# Altium PCB pren-et_DC.PcbDoc
Units mm, origin at the board's own origin, x right, y up, seen from the top; angles counter-clockwise.
Board outline 152.4 x 101.6 mm, 2 copper layers (Top Layer, Bottom Layer); 55 components, 45 nets, 174 pads, 57 vias.
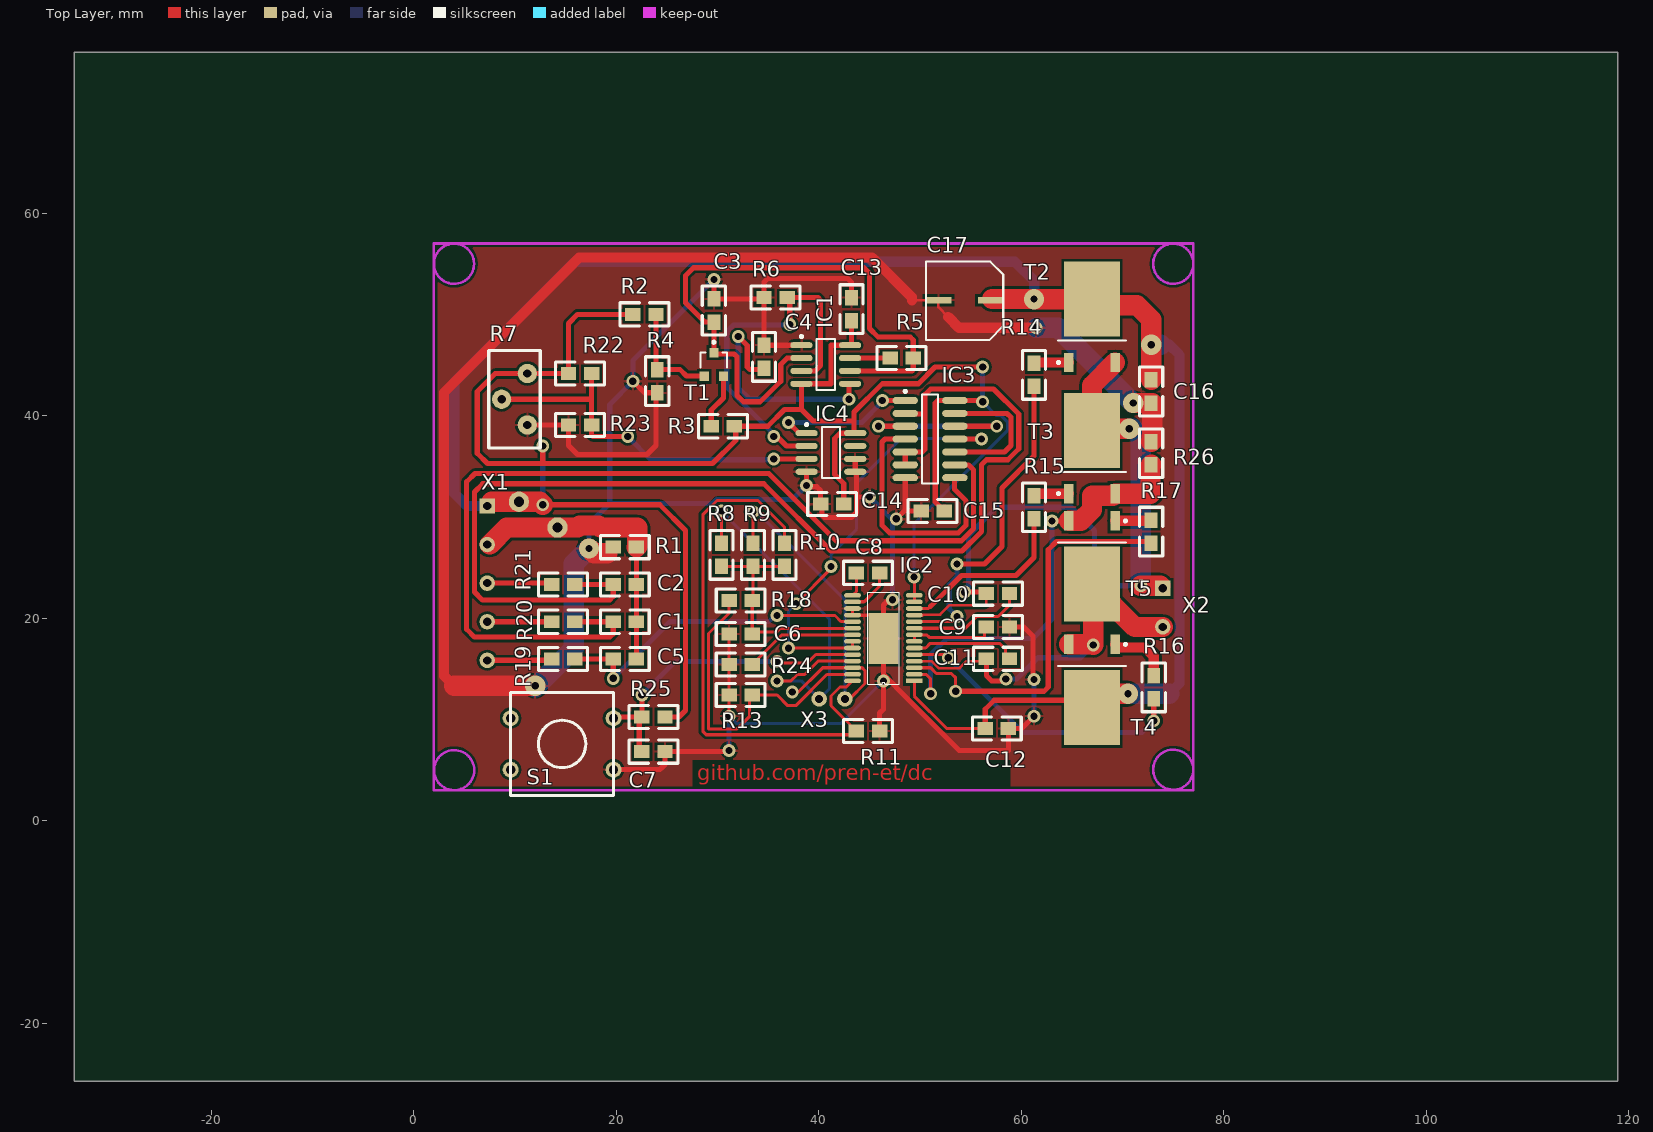
[diagram p0: Top Layer view]
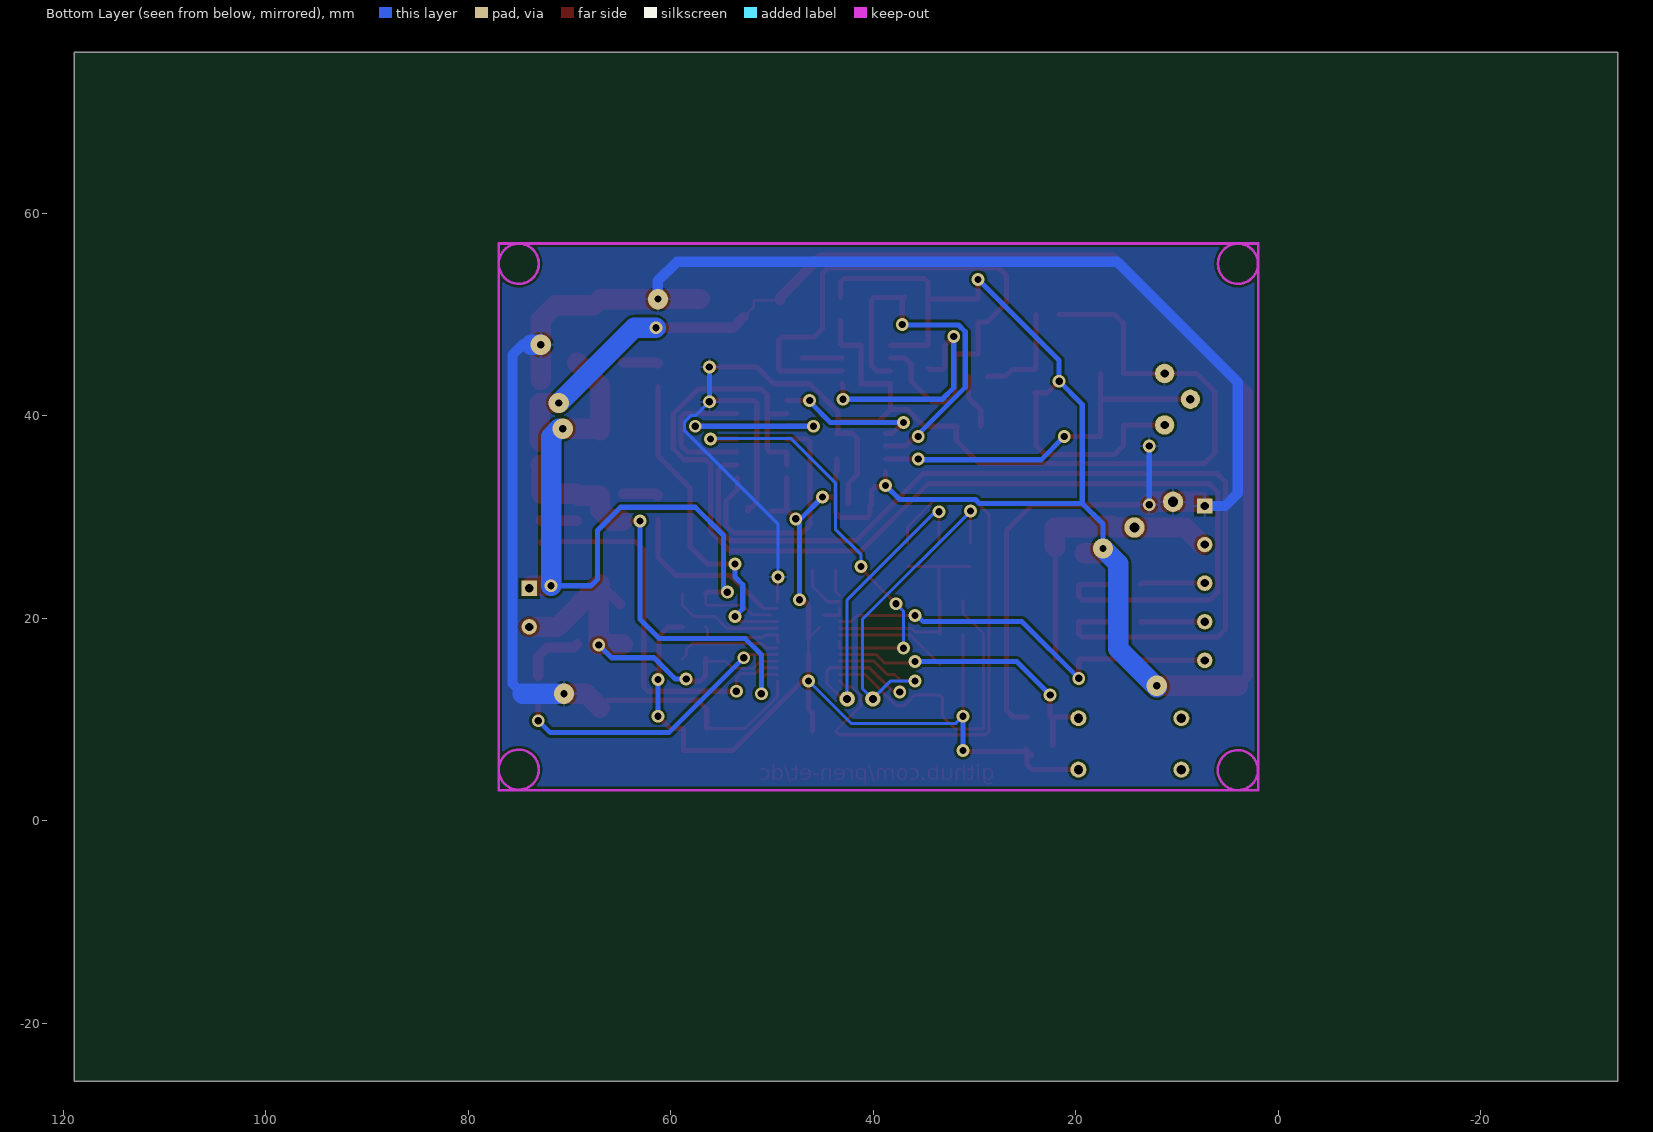
[diagram p1: Bottom Layer view, seen from below]

## Layer stack, top to bottom
Top Solder: solder mask 0.0102, Solder Resist, Dk 3.5
Top Layer: signal copper 0.0356
Dielectric 1: dielectric 0.32, FR-4, Dk 4.8
Bottom Layer: signal copper 0.0356
Bottom Solder: solder mask 0.0102, Solder Resist, Dk 3.5

## Board outline
-33.508,-25.72 118.892,-25.72 118.892,75.88 -33.508,75.88

## Design rules (kind name [scope] priority, off if disabled: settings)
Clearance A3941 [(InComponent('IC2')) and ispad vs (InComponent('IC2')) and ispad] p1: gap=0.127
Clearance Clearance_1 [All] p2: gap=0.254
HoleSize [All] p1: absolutevalues=TRUE maxlimit=3.4 minlimit=0.025 maxpercent=80.000 minpercent=20.000
MinimumSolderMaskSliver [All] p1: minsoldermaskwidth=0.127
PolygonConnect [All] p1: connectstyle=Relief reliefconductorwidth=0.254 reliefentries=4 polygonreliefangle="90 Angle" airgapwidth=0.254
RoutingVias [All] p1: holewidth=0.711 width=1.27 viastyle="Through Hole" minholewidth=0.711 minwidth=1.27 maxholewidth=0.711 maxwidth=1.27
SilkToSilkClearance [All] p1: silktosilkclearance=0.127
SolderMaskExpansion [All] p1: expansion=0.102
UnpouredPolygon [All] p1: allowunpoured=FALSE
Width [All] p1: maxlimit=2 minlimit=0.127 preferedwidth=0.508
26 further rules are at their usual default settings.

## Components (designator, comment, footprint, x,y, rotation, side; value= is the part's Value field where it differs from the comment)
C1 "10p" 0805 19.712,19.652 r0 top
C2 "10p" 0805 19.712,23.335 r0 top
C3 "100n" 0805 29.644,49.243 r90 top
C4 "100n" 0805 34.597,44.671 r90 top
C5 "10p" 0805 19.712,15.969 r0 top
C6 "100n" 0805 33.435,18.431 r180 top
C7 "200n" 0805 24.818,6.825 r180 top
C8 "470n" 0805 43.722,24.478 r0 top
C9 "200n" 0805 56.549,19.124 r0 top
C10 "33n" 0805 58.835,22.426 r180 top
C11 "33n" 0805 56.549,15.991 r0 top
C12 "100n" 0805 58.727,9.111 r180 top
C13 "100n" 0805 43.233,51.656 r270 top
C14 "100n" 0805 42.471,31.285 r180 top
C15 "100n" 0805 50.104,30.574 r0 top
C16 "100n" 0805 72.824,41.242 r90 top
C17 "470u" "EEEFP1E471AP Elko" 54.409,51.402 r0 top
IC1 "TLC555CDR" D008_N 40.693,45.052 r0 top
IC2 "A3941" A3941 49.437,13.81 r180 top
IC3 "CD4001BCM" M14A_M 50.993,37.686 r0 top
IC4 "LM393D" D008_N 41.201,36.365 r0 top
R1 "0" 0805 21.998,27.018 r180 top
R2 "10k" 0805 23.929,50.005 r180 top
R3 "10k" 0805 29.39,38.956 r0 top
R4 "10k" 0805 24.056,42.258 r90 top
R5 "100" 0805 49.329,45.687 r180 top
R6 "10k" 0805 34.597,51.656 r0 top
R7 "10k" POT2 8.689,41.623 r270 top
R8 "10k" 0805 30.387,27.399 r270 top
R9 "10k" 0805 33.499,27.399 r270 top
R10 "20k" 0805 36.61,27.399 r270 top
R11 "30k" 0805 46.008,8.857 r180 top
R13 "400k" 0805 31.149,12.419 r0 top
R14 "50" 0805 61.267,45.179 r270 top
R15 "50" 0805 61.267,32.098 r270 top
R16 "50" 0805 73.078,12.032 r90 top
R17 "50" 0805 72.824,27.399 r90 top
R18 "0" 0805 33.435,21.756 r180 top
R19 "0" 0805 15.902,15.969 r180 top
R20 "0" 0805 15.902,19.652 r180 top
R21 "0" 0805 15.902,23.335 r180 top
R22 "0" 0805 17.579,44.163 r180 top
R23 "0" 0805 15.293,39.083 r0 top
R24 "0" 0805 33.435,15.425 r180 top
R25 "10k" 0805 22.532,10.254 r0 top
R26 "0" 0805 72.824,37.432 r270 top
S1 "SW-PB" SW_JB15FBP2 14.658,7.587 r90 top
T1 "BSR16" BSR16 29.644,45.052 r0 top
T2 "IRFR3806PBF" TO-252AA_N 66.982,49.758 r90 top
T3 "IRFR3806PBF" TO-252AA_N 66.982,36.797 r90 top
T4 "IRFR3806PBF" TO-252AA_N 66.982,12.921 r270 top
T5 "IRFR3806PBF" TO-252AA_N 66.982,25.113 r270 top
X1 "Header 5" "connector 5 Pin" 7.266,31.082 r270 top
X2 "MHDR1X2" "Connector 2 Pin" 73.967,22.954 r270 top
X3 "CON2" "Testpoint 2 Pin" 40.039,12.032 r0 top

## Footprints (in the part's own frame and the unit in brackets; to place one, negate y for a bottom-side part, rotate by r counter-clockwise, add the part's x,y. Pads: shape width x height; smd on the part's side, far side on the other; paste and mask are expansions set on the pad)
0805 [mil]
  rect 60x50 smd: 1(0,0) 2(90,0)
  silkscreen extent -50,-45 140,45
A3941 [mm] "A3941 SOIC IC"
  rect 1.65x0.45 smd: 1(0,0)
  oval 1.65x0.45 smd: 2(0,-0.65) 3(0,-1.3) 4(0,-1.95) 5(0,-2.6) 6(0,-3.25) 7(0,-3.9) 8(0,-4.55) 9(0,-5.2) 10(0,-5.85) 11(0,-6.5) 12(0,-7.15) 13(0,-7.8) 14(0,-8.45) 15(6.1,-8.45) 16(6.1,-7.8) 17(6.1,-7.15) 18(6.1,-6.5) 19(6.1,-5.85) 20(6.1,-5.2) 21(6.1,-4.55) 22(6.1,-3.9) 23(6.1,-3.25) 24(6.1,-2.6) 25(6.1,-1.95) 26(6.1,-1.3) 27(6.1,-0.65) 28(6.1,0)
  rect 3x5 smd: 29(3.048,-4.191)
  silkscreen extent 1.51,-8.78 4.59,0.33
BSR16 [mm] "BSR16 SOT23"
  rect 0.9x0.95 smd: B(-0.95,-1.175) C(0,1.175) E(0.95,-1.175)
  silkscreen extent -1.3,-0.3 1.3,2.32
"Connector 2 Pin" [mil] "Connector 2 Pin"
  rect 60x60 hole 31.5: 1(0,0)
  round 60 hole 31.5: 2(150,0)
"connector 5 Pin" [mil] "connector 5 Pin"
  rect 60x60 hole 31.5: 1(0,0)
  round 60 hole 31.5: 2(150,0) 3(300,0) 4(450,0) 5(600,0)
D008_N [mm] "SOIC, 8-Leads, Body 4.9x3.9mm, Pitch 1.27mm, IPC Medium Density"
  oval 2.2x0.6 smd: 1(-2.4,1.905) 2(-2.4,0.635) 3(-2.4,-0.635) 4(-2.4,-1.905) 5(2.4,-1.905) 6(2.4,-0.635) 7(2.4,0.635) 8(2.4,1.905)
  silkscreen extent -2.52,-2.5 0.9,2.88, body extent -1.95,-2.45 1.95,2.45, height 1.75
"EEEFP1E471AP Elko" [mm] "Elko 470uF"
  rect 2.6x0.65 smd: A(2.6,0) K(-2.6,0)
  silkscreen extent -3.81,-3.94 3.81,3.81
M14A_M [mm] "SOIC, 14-Leads, Body 8.6x3.9mm, Pitch 1.27mm, IPC Low Density"
  oval 2.5x0.7 smd: 1(-2.45,3.81) 2(-2.45,2.54) 3(-2.45,1.27) 4(-2.45,0) 5(-2.45,-1.27) 6(-2.45,-2.54) 7(-2.45,-3.81) 8(2.45,-3.81) 9(2.45,-2.54) 10(2.45,-1.27) 11(2.45,0) 12(2.45,1.27) 13(2.45,2.54) 14(2.45,3.81)
  silkscreen extent -2.57,-4.4 0.8,4.83, body extent -2,-4.38 2,4.38, height 1.75
POT2 [mil]
  round 75 hole 32: 1(-100,100) 2(0,0) 3(100,100)
  silkscreen extent -190,-50 190,150
SW_JB15FBP2 [mil]
  round 62 hole 36: 1(-100,-200) 2(100,-200) 3(100,200) 4(-100,200)
  silkscreen extent -200,-200 200,200
"Testpoint 2 Pin" [mil] "Testpoint 2 Pin"
  round 60 hole 31.5: 1(0,0) 2(100,0)
TO-252AA_N [mm] "D-PAK, 4-Leads, Body 6.1x6.5mm, Pitch 2.28mm, Lead Span 9.9mm, IPC Medium Density"
  rect 1.9x0.95 smd: 1(-4.5,2.28) 3(-4.5,-2.28)
  rect 7.4x5.5 smd: 4(1.75,0)
  silkscreen extent -4.62,-3.35 -2.35,3.43, body extent -2.25,-3.37 4.1,3.37, height 2.38

## Part data
C1 C2 C3 C4 C5 C6 C7 C8 C9 C10 C11 C12 C13 C14 C15 C16: library part C?, "Normaler Kondensator"
C17: library part "C? ELKO", "Elektrolyt /polarisierter Kondensator"
IC1: "LinCMOS Timer"
IC2: "A3941 SOIC IC"
IC3: "Quad 2-Input NOR Buffered B series Gate, 14-Pin SOIC"
IC4: "Dual Differential Comparator"
R1 R2 R3 R4 R5 R6 R8 R9 R10 R11 R13 R14 R15 R16 R17 R18 R19 R20 R21 R22 R23 R24 R25 R26: library part R?, "Normaler Widerstand"
R7: library part R_POT1
S1: "Switch"
T1: library part PNP
T2 T3 T4 T5: library part IRFR014, "N-Channel Power MOSFET"
X1: "Header, 5-Pin"
X2: "Header, 2-Pin"

## Free pads (board coordinates)
  round 2 hole 1: GND(14.208,28.956) VCC(10.398,31.496)

## Via types
v1: diameter 1.27, hole 0.711, Top Layer to Bottom Layer, 50 vias
v2: diameter 2, hole 0.711, Top Layer to Bottom Layer, 7 vias

## Nets (pads, with @x,y where several pads share a name; then routed paths per layer and width w, separated by ;. In a path a pad name is that pad's centre, name@x,y a point inside that pad or via, vN(x,y) a via of type N, cw(c..) or ccw(c..) an arc to the next point about the centre after c; other vN are vias at no path point)
GND: C1.2 C2.2 C5.2 pad.GND R1.1 X1.2 | length 28.5
  Top Layer w0.508: C5.2 C1.2 C2.2 R1.1
  Top Layer w2: X1.2@7.504,27.272 9.188,28.956 11.818,28.956 11.82,28.955 13.687,28.955 13.688,28.956 16.203,28.956 16.392,29.145 18.259,29.145 18.448,28.956 22.082,28.956 22.082,27.102 R1.1
GND_FILT: C3.2 C4.2 C6.2 C7.1 C9.2 C12.1 C13.1 C14.2 C15.1 C16.1 C17.K IC1.1 IC2.17 IC2.18 IC2.29 IC3.7 IC4.4 IC4.5 IC4.6 R1.2 R4.1 R6.1 R7.3 R11.1 R13.1 R23.1 R24.2 R26.1 S1.1 | length 369.9
  Top Layer w0.254: 49.202,51.402 C17.K 51.809,50.713 52.771,49.751
  Top Layer w0.305: 24.31,5.047 24.437,5.174 ; v1(31.149,10.326) R13.1 R24.2 C6.2 ; IC2.17@43.319,20.979 IC2.17 IC2.18 43.356,20.291 44.88,20.291 44.884,20.287 ; IC2.29@45.312,19.079 IC2.29 IC2.29@46.389,16.35
  Top Layer w0.508: R7.3 R23.1 15.293,37.051 16.182,36.162 23.04,36.162 23.929,37.051 23.929,42.131 R4.1 22.786,42.258 v1(21.643,43.401) ; R1.2@19.11,26.416 R1.2 ; S1.1 24.31,5.047 ; C7.1@24.31,6.444 C7.1@24.945,7.079 ; 24.437,5.174 24.818,5.555 C7.1 31.041,6.825 31.041,6.844 v1(31.149,6.952) ; v1(29.644,53.459) C3.2 34.47,51.529 R6.1 ; IC1.1 C4.2 R6.1 ; IC4.4 38.801,33.127 v1(38.788,33.114) 38.915,32.987 39.804,32.987 40.185,32.606 C14.2 40.312,31.158 40.312,30.218 40.591,29.939 43.233,29.939 43.436,30.142 43.444,30.142 43.741,30.439 43.741,31.971 ; C13.1 43.233,53.18 42.852,53.561 34.978,53.561 34.597,53.18 R6.1 ; IC4.6 IC4.5 43.741,34.32 43.741,31.971 ; v1(45.011,31.971) 43.741,31.971 ; R11.1 46.008,10.637 46.387,11.016 46.387,13.808 v1(46.389,13.81) ; IC2.29@46.389,16.35 46.389,14.464 47.678,13.175 47.678,13.13 53.856,6.952 58.727,6.952 C12.1 60.053,9.111 v1(61.267,10.326) ; IC2.29 46.389,21.292 47.278,22.181 v1(47.278,21.819) ; v1(47.658,29.812) 48.543,30.697 48.543,30.865 ; IC3.7 48.543,30.865 ; C15.1 48.834,30.574 48.543,30.865 ; C9.2 60.231,19.124 60.251,19.144 61.14,18.255 61.14,14.064 v1(61.267,13.937)
  Top Layer w1.016: 3.99,13.327 3,14.318 3,42.284 16.335,55.618 45.265,55.618 49.202,51.681 49.202,51.402 ; 52.771,49.751 53.843,48.679 v1(61.466,48.679)
  Top Layer w2: 3.99,13.327 v2(12,13.327) ; v2(17.325,26.891) 17.8,26.416 R1.2@19.11,26.416 ; v2(71.046,41.242) C16.1 72.921,41.242 72.921,37.528 R26.1
  Bottom Layer w0.305: v1(31.149,10.326) 31.856,9.619 42.198,9.619 v1(46.389,13.81)
  Bottom Layer w0.508: v2(17.325,26.891) 17.325,29.304 19.357,31.336 ; v1(29.644,53.459) 21.643,45.458 v1(21.643,43.401) 19.357,41.115 19.357,31.336 ; v1(31.149,6.952) v1(31.149,10.326) ; v1(38.788,33.114) 37.391,31.717 29.914,31.717 29.532,31.336 19.357,31.336 ; v1(45.011,31.971) 47.17,29.812 v1(47.658,29.812) 47.278,29.432 v1(47.278,21.819) ; v1@61.14,13.99 61.193,13.937 v1(61.267,13.937) v1(61.267,10.326)
  Bottom Layer w2: v2(12,13.327) 12,13.175 15.801,16.976 15.801,25.367 v2(17.325,26.891) ; v1(61.466,48.679) 63.609,48.679 v2(71.046,41.242)
NetC1_1: C1.1 IC3.9 R20.1 | length 96
  Top Layer w0.508: R20.1 C1.1 19.712,18.468 19.372,18.128 6.022,18.128 5.234,18.916 5.234,33.469 6.055,34.29 35.065,34.29 39.213,30.142 39.221,30.142 41.709,27.653 54.09,27.653 55.298,28.861 55.298,34.638 54.79,35.146 IC3.9
NetC2_1: C2.1 IC3.2 IC3.5 IC3.6 R21.1 | length 118.5
  Top Layer w0.508: R21.1 C2.1 19.712,22.166 19.357,21.811 6.784,21.811 5.996,22.599 5.996,32.454 6.817,33.274 34.564,33.274 41.201,26.637 54.152,26.637 56.06,28.546 56.06,35.146 56.568,35.654 58.662,35.654 59.743,36.735 59.743,40.161 57.265,42.639 51.053,42.639 50.472,42.058 50.472,40.161 ; IC3.6 IC3.5 50.218,36.416 50.472,36.67 50.472,40.161 ; IC3.2 48.608,40.161 50.472,40.161
NetC3_1: C3.1 IC1.2 IC1.6 R5.1 T1.C | length 63.2
  Top Layer w0.508: IC1.2 36.883,45.687 36.248,45.052 36.248,43.401 34.216,41.369 32.565,41.369 31.93,42.004 31.93,45.814 31.644,46.1 29.644,46.1 C3.1 28.755,49.243 26.85,51.148 26.85,53.815 27.638,54.602 44.478,54.602 45.011,54.069 45.011,48.615 45.875,47.751 49.043,47.751 49.329,47.465 R5.1 49.329,44.544 49.202,44.417 IC1.6
NetC4_1: C4.1 IC1.5 | length 23.2
  Top Layer w0.508: v1(32.057,47.807) 32.946,46.918 32.946,44.798 33.2,44.544 34.47,44.544 C4.1 ; v1(42.979,41.623) 42.979,43.033 IC1.5
  Bottom Layer w0.508: v1(32.057,47.807) 32.057,42.766 33.175,41.648 33.175,41.623 v1(42.979,41.623)
NetC5_1: C5.1 IC2.19 R19.1 | length 32.2
  Top Layer w0.305: v1(35.867,20.266) 41.598,20.266 42.185,19.679 43.319,19.679 IC2.19
  Top Layer w0.508: R19.1 C5.1 v1(19.712,14.064)
  Bottom Layer w0.508: v1(19.712,14.064) 25.308,19.66 35.056,19.66 35.662,20.266 v1(35.867,20.266)
NetC6_1: C6.1 IC2.20 R8.2 R9.2 R10.2 R18.1 | length 23.1
  Top Layer w0.305: R8.2 R9.2 ; R10.2 R9.2 ; IC2.20 43.319,18.991 36.211,18.991 35.856,18.636 33.641,18.636 C6.1 R18.1 33.499,21.819 R9.2
NetC7_2: C7.2 IC2.24 R25.1 S1.2 | length 30.4
  Top Layer w0.305: v1(35.893,15.715) 36.02,15.588 38.896,15.588 39.718,16.41 IC2.24
  Top Layer w0.508: S1.2 19.865,10.254 R25.1@22.278,10.254 ; 22.278,7.46 R25.1@22.278,10.254 ; v1(22.532,12.413) R25.1 R25.1@22.278,10.254
  Bottom Layer w0.508: v1(22.532,12.413) 25.834,15.715 v1(35.893,15.715)
NetC8_1: C8.1 IC2.15 | length 2.6
  Top Layer w0.305: IC2.15 43.722,22.645 C8.1@43.722,24.732
NetC8_2: C8.2 IC2.16 | length 4.9
  Top Layer w0.305: IC2.16@43.356,21.629 44.49,21.629 46.008,23.147 C8.2@46.008,24.732
NetC9_1: C9.1 IC2.7 IC2.8 | length 8.9
  Top Layer w0.305: IC2.7@49.297,17.71 IC2.7 IC2.8 50.645,18.36 50.899,18.106 56.369,18.106 56.369,18.944 C9.1
NetC10_1: C10.1 IC2.9 | length 11.5
  Top Layer w0.305: IC2.9 54.463,19.01 55.619,20.166 57.717,20.166 58.835,21.284 C10.1
NetC10_2: C10.2 IC2.11 T2.3 T3.4 X2.1 | length 70
  Top Layer w0.254: IC2.11@50.174,20.31 IC2.11@50.218,20.266 ; IC2.11@50.174,20.354 51.986,20.354 52.915,21.283 56.441,21.283 56.549,21.391 C10.2
  Top Layer w0.508: v1(54.409,22.573) 56.402,22.573 C10.2
  Top Layer w1.016: X2.1@73.713,23.208 X2.1
  Top Layer w2: T2.3 66.982,42.978 T3.4 67.137,38.702 v2(70.667,38.702) ; v1(71.808,23.208) X2.1@73.713,23.208
  Bottom Layer w0.508: v1(54.409,22.573) 54.536,22.573 54.79,22.827 54.79,28.161 57.584,30.955 64.95,30.955 67.236,28.669 67.236,23.843 67.871,23.208 v1(71.808,23.208)
  Bottom Layer w1.016: v2(70.667,38.702) v2@71.046,38.702
  Bottom Layer w2: v2@71.046,38.702 71.808,37.94 v1(71.808,23.208)
NetC11_1: C11.1 IC2.4 T4.3 T5.4 X2.2 | length 43.6
  Top Layer w0.254: IC2.4 51.157,15.76 51.837,15.08 53.918,15.08 54.598,15.76 56.318,15.76 C11.1
  Top Layer w0.508: C11.1 56.549,14.337 57.076,13.81 v1@58.2,13.81 ; T4.3 64.757,17.366 v1(67.109,17.366)
  Top Layer w1.016: T5.4@65,21.381 T5.4 ; 71.681,19.124 71.701,19.144
  Top Layer w2: T4.3 67.054,17.421 v1(67.109,17.366) T5.4@67.109,23.236 ; T5.4 T5.4@67.109,23.236 ; 71.681,19.124 71.221,19.124 T5.4@67.109,23.236 ; 71.701,19.144 X2.2
  Bottom Layer w0.508: v1(58.473,13.99) 59.542,13.99 61.648,16.096 65.839,16.096 v1(67.109,17.366)
NetC11_2: C11.2 IC2.6 | length 10.6
  Top Layer w0.305: IC2.6@49.456,17.041 IC2.6 50.56,17.06 51.015,17.515 57.85,17.515 58.454,16.911 58.454,16.372 C11.2
NetIC1_3: IC1.3 IC4.2 R6.2 | length 37.2
  Top Layer w0.508: v1(35.562,37.94) 35.867,37.94 36.808,37 IC4.2 ; v1(37.137,48.989) 37.137,51.402 R6.2 39.931,51.656 40.185,51.402 40.185,44.936 39.666,44.417 IC1.3
  Bottom Layer w0.508: v1(35.562,37.94) 35.562,38.158 30.914,42.806 30.914,48.28 31.584,48.95 37.098,48.95 v1(37.137,48.989)
NetIC1_7: IC1.7 R5.2 | length 3.9
  Top Layer w0.508: IC1.7 R5.2
NetIC2_2: IC2.2 R26.2 T3.3 T5.3 | length 44.8
  Top Layer w0.305: IC2.2 50.583,14.46 51.053,13.99 v1(51.053,12.54)
  Top Layer w0.508: v1(63.045,29.613) T5.3
  Top Layer w2: T5.3 65.894,29.613 66.982,30.701 66.982,32.098 69.063,32.098 T3.3 72.752,32.297 72.752,35.074 R26.2
  Bottom Layer w0.508: v1(51.053,12.54) 51.053,16.403 52.631,17.981 61.12,17.981 63.045,19.906 v1(63.045,29.613)
NetIC2_3: IC2.3 R17.1 | length 39.4
  Top Layer w0.305: IC2.3 51.053,15.11 51.616,14.547 53.094,14.547 53.52,14.12 v1(53.52,12.794)
  Top Layer w0.508: v1(53.52,12.794) 62.258,12.794 62.664,13.2 62.664,26.764 63.471,27.571 72.824,27.571 R17.1
NetIC2_5: IC2.5 R16.1 | length 29.5
  Top Layer w0.305: IC2.5 52.473,16.41 v1(52.787,16.096)
  Top Layer w0.508: v1(73.078,9.873) R16.1
  Bottom Layer w0.508: v1(52.787,16.096) 60.153,8.73 71.935,8.73 v1(73.078,9.873)
NetIC2_10: IC2.10 R14.2 | length 32.6
  Top Layer w0.305: IC2.10@49.419,19.641 IC2.10 53.142,19.66 v1(53.647,20.166)
  Top Layer w0.508: v1(53.647,25.367) 56.369,25.367 58.092,27.09 58.092,32.86 61.267,36.035 R14.2
  Bottom Layer w0.508: v1(53.647,20.166) 52.885,20.928 52.885,23.305 53.647,24.067 v1(53.647,25.367)
NetIC2_12: IC2.12 R15.2 | length 17.7
  Top Layer w0.305: IC2.12 50.837,20.96 51.053,21.176
  Top Layer w0.508: 51.053,21.176 54.101,24.224 56.304,24.224 59.489,24.224 61.267,26.002 R15.2
NetIC2_21: IC2.21 R24.1 | length 11.1
  Top Layer w0.305: R24.1 36.37,18.36 IC2.21 IC2.21@43.319,18.341
NetIC2_22: IC2.22 IC2.23 IC3.11 | length 42.5
  Top Layer w0.305: v1@37.429,17.041 37.855,17.041 43.319,17.041 IC2.23 IC2.22 ; v1(37.753,21.43) 41.201,24.878 v1(41.201,25.113)
  Top Layer w0.508: IC3.11 v1(56.06,37.686)
  Bottom Layer w0.305: v1(37.01,17.041) 37.01,20.687 v1(37.753,21.43) ; v1(41.201,25.113) 41.201,26.256 43.741,28.796 43.741,33.368 48.135,37.762 55.985,37.762 v1(56.06,37.686)
NetIC2_25: IC2.25 R8.1 X3.1 | length 39.7
  Top Layer w0.305: R8.1 v1(30.387,30.574) ; v1(35.893,13.81) 37.268,13.81 37.899,14.441 38.61,14.441 39.929,15.76 IC2.25
  Bottom Layer w0.305: v1(30.387,30.574) 41.055,19.906 41.055,13.048 X3.1 38.261,13.81 v1(35.893,13.81)
NetIC2_26: IC2.26 R9.1 X3.2 | length 38.2
  Top Layer w0.305: R9.1 v1(33.499,30.51) ; v1(37.391,12.712) 37.691,12.413 40.388,15.11 IC2.26 44.285,15.11 44.569,14.826 44.569,13.548 43.052,12.032 X3.2
  Bottom Layer w0.305: v1(33.499,30.51) 33.689,30.701 42.579,21.811 X3.2
NetIC2_27: IC2.27 R13.2 R18.2 | length 31.9
  Top Layer w0.305: R18.2 31.149,20.522 29.117,18.49 29.117,9.056 31.911,9.056 33.181,10.326 33.181,12.165 R13.2 35.893,12.419 36.941,11.372 37.726,11.372 40.796,14.441 43.319,14.441 IC2.27
NetIC2_28: IC2.28 R10.1 R11.2 | length 55.4
  Top Layer w0.305: R10.1 36.61,29.012 34.006,31.615 29.956,31.615 28.558,30.218 28.558,8.824 28.886,8.497 43.362,8.497 R11.2 41.208,11.372 41.208,12.313 42.095,13.2 42.728,13.2 IC2.28
NetIC3_1: IC3.1 IC4.1 | length 14.7
  Top Layer w0.508: v1(37.01,39.337) 38.078,38.27 IC4.1 ; v1(46.281,41.496) 48.493,41.496 IC3.1@48.518,41.521
  Bottom Layer w0.508: v1(37.01,39.337) 44.25,39.337 46.281,41.369 v1(46.281,41.496)
NetIC3_3: IC3.3 IC3.12 | length 18.5
  Top Layer w0.508: v1(45.9,38.956) IC3.3 ; IC3.12 v1(57.584,38.956)
  Bottom Layer w0.508: v1(45.9,38.956) v1(57.584,38.956)
NetIC3_4: IC3.4 IC3.8 | length 24.7
  Top Layer w0.508: IC3.4 46.535,37.686 46.255,37.405 46.255,29.177 47.017,28.415 53.774,28.415 54.536,29.177 54.536,31.59 53.393,32.733 53.393,33.826 IC3.8
NetIC3_10: IC3.10 IC3.13 | length 14.3
  Top Layer w0.508: IC3.10 58.346,36.416 58.981,37.051 58.981,39.845 58.6,40.226 IC3.13
NetIC4_3: IC4.3 R7.2 R22.1 R23.2 | length 37.2
  Top Layer w0.508: R7.2 17.579,41.623 ; R22.1 17.579,41.623 ; v1(21.135,37.94) 17.706,37.94 17.579,38.067 R23.2 17.579,41.623 ; v1(35.562,35.73) IC4.3
  Bottom Layer w0.508: v1(21.135,37.94) 23.421,35.654 35.486,35.654 v1(35.562,35.73)
NetR2_1: R2.1 R4.2 T1.B | length 10.4
  Top Layer w0.508: R2.1 23.929,44.671 R4.2 26.316,44.544 26.951,43.909 28.662,43.909 T1.B
NetR3_1: R3.1 T1.E | length 5.4
  Top Layer w0.508: R3.1 29.39,40.546 30.594,41.75 T1.E
NetR14_1: R14.1 T2.1 | length 3.5
  Top Layer w1.016: R14.1 61.346,45.258 T2.1
NetR15_1: R15.1 T3.1 | length 3.5
  Top Layer w1.016: R15.1 61.466,32.297 T3.1
NetR16_2: R16.2 T4.1 | length 6.2
  Top Layer w1.016: T4.1 69.572,17.112 72.189,17.112 73.078,16.223 R16.2
NetR17_2: R17.2 T5.1 | length 3.6
  Top Layer w1.016: T5.1 72.752,29.613 R17.2
NetR19_2: R19.2 X1.5 | length 6.4
  Top Layer w0.508: X1.5 13.489,15.842 R19.2
NetR20_2: R20.2 X1.4 | length 6.3
  Top Layer w0.508: X1.4 R20.2
NetR21_2: R21.2 X1.3 | length 6.4
  Top Layer w0.508: X1.3 13.489,23.462 R21.2
VCC: C12.2 C13.2 C14.1 C15.2 C16.2 C17.A IC1.4 IC1.8 IC2.1 IC2.13 IC2.14 IC3.14 IC4.8 pad.VCC R2.2 R3.2 R7.1 R22.2 R25.2 T2.4 T4.4 X1.1 | length 371.8
  Top Layer w0.254: IC2.13 IC2.13@49.481,21.654
  Top Layer w0.305: v1(49.419,24.067) 49.437,24.048 IC2.14 IC2.13 ; IC2.1 49.437,12.305 52.631,9.111 C12.2
  Top Layer w0.508: X1.1 X1.1@7.68,31.496 ; v1(12.753,31.209) 24.31,31.209 26.85,28.669 26.85,10.889 26.216,10.254 R25.2 ; v1(12.753,37) 12.753,35.273 ; R2.2 16.188,50.005 15.293,49.11 R22.2 R7.1 8.054,44.163 6.276,42.385 6.276,36.289 7.292,35.273 12.753,35.273 ; C14.1 42.471,33.291 41.582,34.18 41.582,37.762 42.09,38.27 IC4.8 43.487,38.384 43.487,39.464 ; C13.2 43.233,47.097 IC1.8 41.201,46.957 41.201,43.147 IC1.4 38.293,40.607 ; C15.2@52.39,30.98 C15.2 51.501,31.463 51.501,41.255 51.742,41.496 56.06,41.496 v1(56.187,41.369) ; v1(56.187,44.798) 51.488,44.798 49.837,43.147 46.281,43.147 43.487,40.353 43.487,39.464 ; C12.2 56.441,11.016 57.33,11.905 66.248,11.905 T4.4 ; 12.753,35.273 29.517,35.273 31.803,37.559 31.803,38.829 R3.2 34.962,38.956 36.613,40.607 38.293,40.607 ; 38.293,40.607 39.436,39.464 43.487,39.464
  Top Layer w1.016: C17.A C17.A@57.12,51.513 ; T2.4 T2.4@67.596,50.894
  Top Layer w2: X1.1@7.68,31.496 12.466,31.496 v1(12.753,31.209) ; C17.A@57.12,51.513 61.262,51.513 v2(61.267,51.508) T2.4 ; T4.4 68.351,12.54 v2(70.538,12.54) ; T2.4@67.596,50.894 71.427,50.894 72.824,49.497 v2(72.824,47) C16.2
  Bottom Layer w0.305: v1(49.419,24.067) 49.419,29.318 58.626,38.525 58.626,39.387 58.016,39.997 57.559,39.997 v1(56.187,41.369)
  Bottom Layer w0.508: v1(12.753,31.209) v1(12.753,37) ; v1(56.187,41.369) v1(56.187,44.798)
  Bottom Layer w1: v2@73.782,47 74.618,47 75.618,46 75.618,13.546 74.612,12.54
  Bottom Layer w1.016: X1.1 5.26,31.082 4,32.342 4,43.284 15.928,55.212 59.362,55.212 61.267,53.307 v2(61.267,51.508)
  Bottom Layer w2: v2(70.538,12.54) 74.612,12.54 ; v2(72.824,47) v2@73.782,47
VDD: 
pads on no net: IC4.7 S1.3 S1.4

## Polygon pours and split planes (outlines as drawn)
GND_FILT on Top Layer "GND_FIlt" (solid, remove dead copper, pour order 6): -1,60 80,60 80,0 -1,0 -1,60
VCC on Bottom Layer "VCC" (solid, remove dead copper, pour order 8): -1,60 80,60 80,0 -1,0 -1,60

## Keep-outs
Keep-Out Layer:
  circle w0.254: c3.99,55 r1.979
  circle w0.254: c75,55 r1.979
  circle w0.254: c75,5.047 r1.979
  circle w0.254: c4,5 r1.979
  lines w0.254: 2,3 77,3 77,57 2,57 2,3

## Other copper
Top Layer:
  text "github.com/pren-et/dc" at 28,4 h1.52

## Silkscreen, mask and mechanical layers (free items; w line width, h text height)
Mechanical 1:
  circle w0.254: c3.99,55 r1.808
  circle w0.254: c75,55 r1.808
  circle w0.254: c75,5.047 r1.808
  circle w0.254: c3.99,5 r1.808
  lines w0.254: -1,0 -1,60 80,60 80,0 -1,0